# Altium PCB STM32F103C8T6_PCB.PcbDoc (part 2 of 2)
Units mm, origin at the board's own origin, x right, y up, seen from the top; angles counter-clockwise.
Board outline 40 x 65.43 mm, 2 copper layers (Top Layer, Bottom Layer); 38 components, 50 nets, 176 pads, 35 vias.
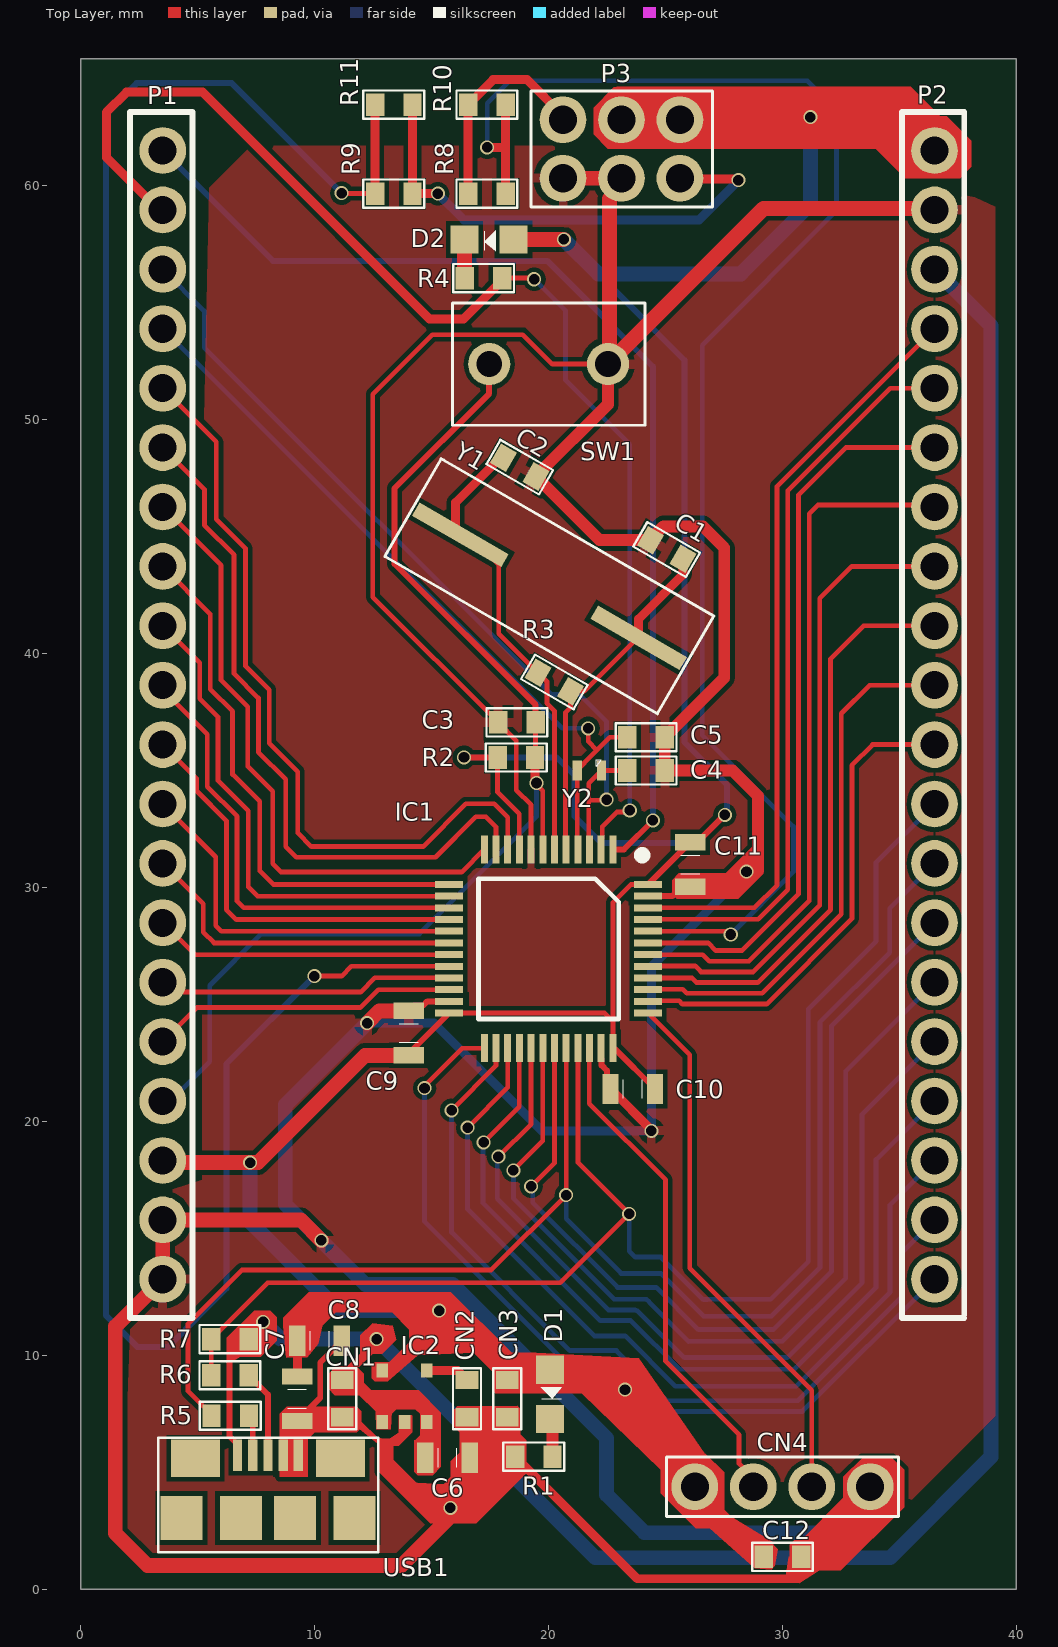
[diagram p0: Top Layer view]

## Other copper (continued)
Top Layer: (continued)
  region net VCC_3.3V: 8.776,9.906 9.677,9.906 10.16,10.49 10.312,11.252 10.897,11.836 13.31,11.836 14.046,11.1 14.046,10.566 13.183,9.703 12.573,9.703 12.446,9.576 12.446,9.017 12.573,8.89 13.132,8.89 14.402,10.008 16.789,10.109 17.602,9.296 18.414,10.108 15.822,12.7 9.754,12.7 8.661,11.608 8.661,11.252
  region net VCC_3.3V: 8.776,9.905 8.763,10.058 8.661,11.252 9.373,11.963 10.77,11.963
  region net +5: 6.248,10.744 6.248,9.728 6.223,9.703 6.502,9.754 6.807,9.931 7.696,9.931 8.382,10.617 8.382,11.633 8.103,11.913 7.417,11.913
  region net +5: 11.336,9.5 11.38,9.5 11.938,10.058 11.938,10.846 12.471,11.379 13.335,11.252 13.487,10.668 12.878,10.058 12.471,10.058 11.913,9.5
  region net VCC_3.3V: 19.481,10.108 18.414,10.108 17.602,9.296 17.602,8.509 17.729,8.382 21.416,8.382 21.467,8.433
  region net GND: 13.006,6.426 12.751,6.171 12.751,5.004 14.275,3.48 15.799,3.48 17.424,5.105 17.424,5.309 16.815,5.918 16.281,5.918 15.824,5.461 15.824,4.801 15.519,4.496 14.376,4.547 14.351,4.547 13.36,5.537 13.36,6.426
  region net GND: 16.104,7.823 15.977,7.696 15.951,7.696 15.951,6.96 16.205,6.706 16.205,4.978 16.307,4.877 16.332,4.902 18.72,4.902 19.05,5.232 19.05,6.375 18.796,6.629 18.796,7.722 18.669,7.849 18.644,7.823 16.129,7.823 17.755,7.823
  region net GND: 30.3,1.4 30.277,1.377 30.109,0.393 30.709,0.254 31.547,0.787 31.547,1.524 31.171,1.9 30.3,1.9
  region net VCC_3.3V: 19.481,10.108 19.253,9.881 19.253,8.763 19.583,8.433 21.416,8.382 24.8,5.1 25.5,5.8 26.675,5.8 23.851,9.881
  region net GND: 12,7.25 12,7.156 12.689,6.466 13.161,6.413 13.589,6.68 13.589,7.442 14.148,7.442 14.173,7.417 14.173,6.706 13.589,6.121 12.802,6.121 11.912,6.853
  region net +5: 15.392,5.232 15.037,4.877 14.402,4.877 14.249,5.029 14.249,6.375 14.3,6.375 14.503,6.579 14.503,7.493 14.3,7.696 13.496,7.696 13.3,7.5 12.878,7.922 12.305,8.495 14.441,8.495 15.392,7.544
  region net VCC_3.3V: 29.6,2 29.6,1.9 29.8,1.7 29.667,0.991 29.515,0.838 28.804,0.9 26.9,2.6 26.3,2.6 24.8,4.1 24.8,5.1 25.5,5.8 26.7,5.8 27.5,5 27.5,3.4 27.8,3.1
  region net GND: 31.4,1 31.2,0.8 30.4,0.8 30.3,0.9 30.3,1.9 30.5,2.1 30.8,2.1 32.6,3.9 32.6,4.8 33.4,5.6 34.7,5.6 35.2,5.1 35.2,3.5 32.5,0.8 31.1,0.8
  region net +5: 10.872,9.5 10.592,9.22 10.592,8.56 10.852,8.3 11.9,8.3 12.6,7.6 12.626,6.833 13.254,6.833 13.3,7.63 12.1,8.83 12.1,9.2 11.8,9.5
  region net GND: 11.8,7.8 8.8,7.8 8.5,7.5 8.5,4.8 9.7,4.8 9.7,6.4 10,6.7 11.8,6.7 12,6.9 12,7.6

## Text inside footprints (layer, text, board x,y; h text height)
C6: Top Designator "d.Designator" at 17.062,5.608 h0.05 r180
C7: Top Designator "d.Designator" at 9.236,6.752 h0.05 r90
C8: Top Designator "d.Designator" at 11.601,10.607 h0.05 r180
C9: Top Designator "d.Designator" at 14.031,25.164 h0.05 r270
C10: Top Designator "d.Designator" at 22.207,21.397 h0.05
C11: Top Designator "d.Designator" at 26.05,29.598 h0.05 r90
CN4: Top Designator "d.Designator" at 27.511,5.32 h0.51
D1: Top Designator "d.Designator" at 19.94,9.274 h0.4 r270
D2: Top Designator "d.Designator" at 18.392,57.835 h0.4 r180
IC2: Top Designator "d.Designator" at 14.396,8.487 h0.3 r180
P1: Top Designator "d.Designator" at 2.535,40.123 h0.51 r270
P2: Top Designator "d.Designator" at 35.535,40.123 h0.51 r270
P3: Top Designator "d.Designator" at 25.146,61.753 h0.51 r180
SW1: Top Designator "d.Designator" at 17.892,53.701 h0.51
USB1: Top Designator "d.Designator" at 9,4.38 h0.3
Y1: Top Designator "d.Designator" at 21.208,41.087 h0.51 r150
Y2: Top Designator "d.Designator" at 22.302,35.274 h0.15 r180